# Altium PCB AUDIO-AMPLIFIER.PcbDoc
Units mm, origin at the board's own origin, x right, y up, seen from the top; angles counter-clockwise.
Board outline 66.17 x 46.1 mm, 2 copper layers (Top Layer, Bottom Layer); 15 components, 11 nets, 34 pads, 0 vias.
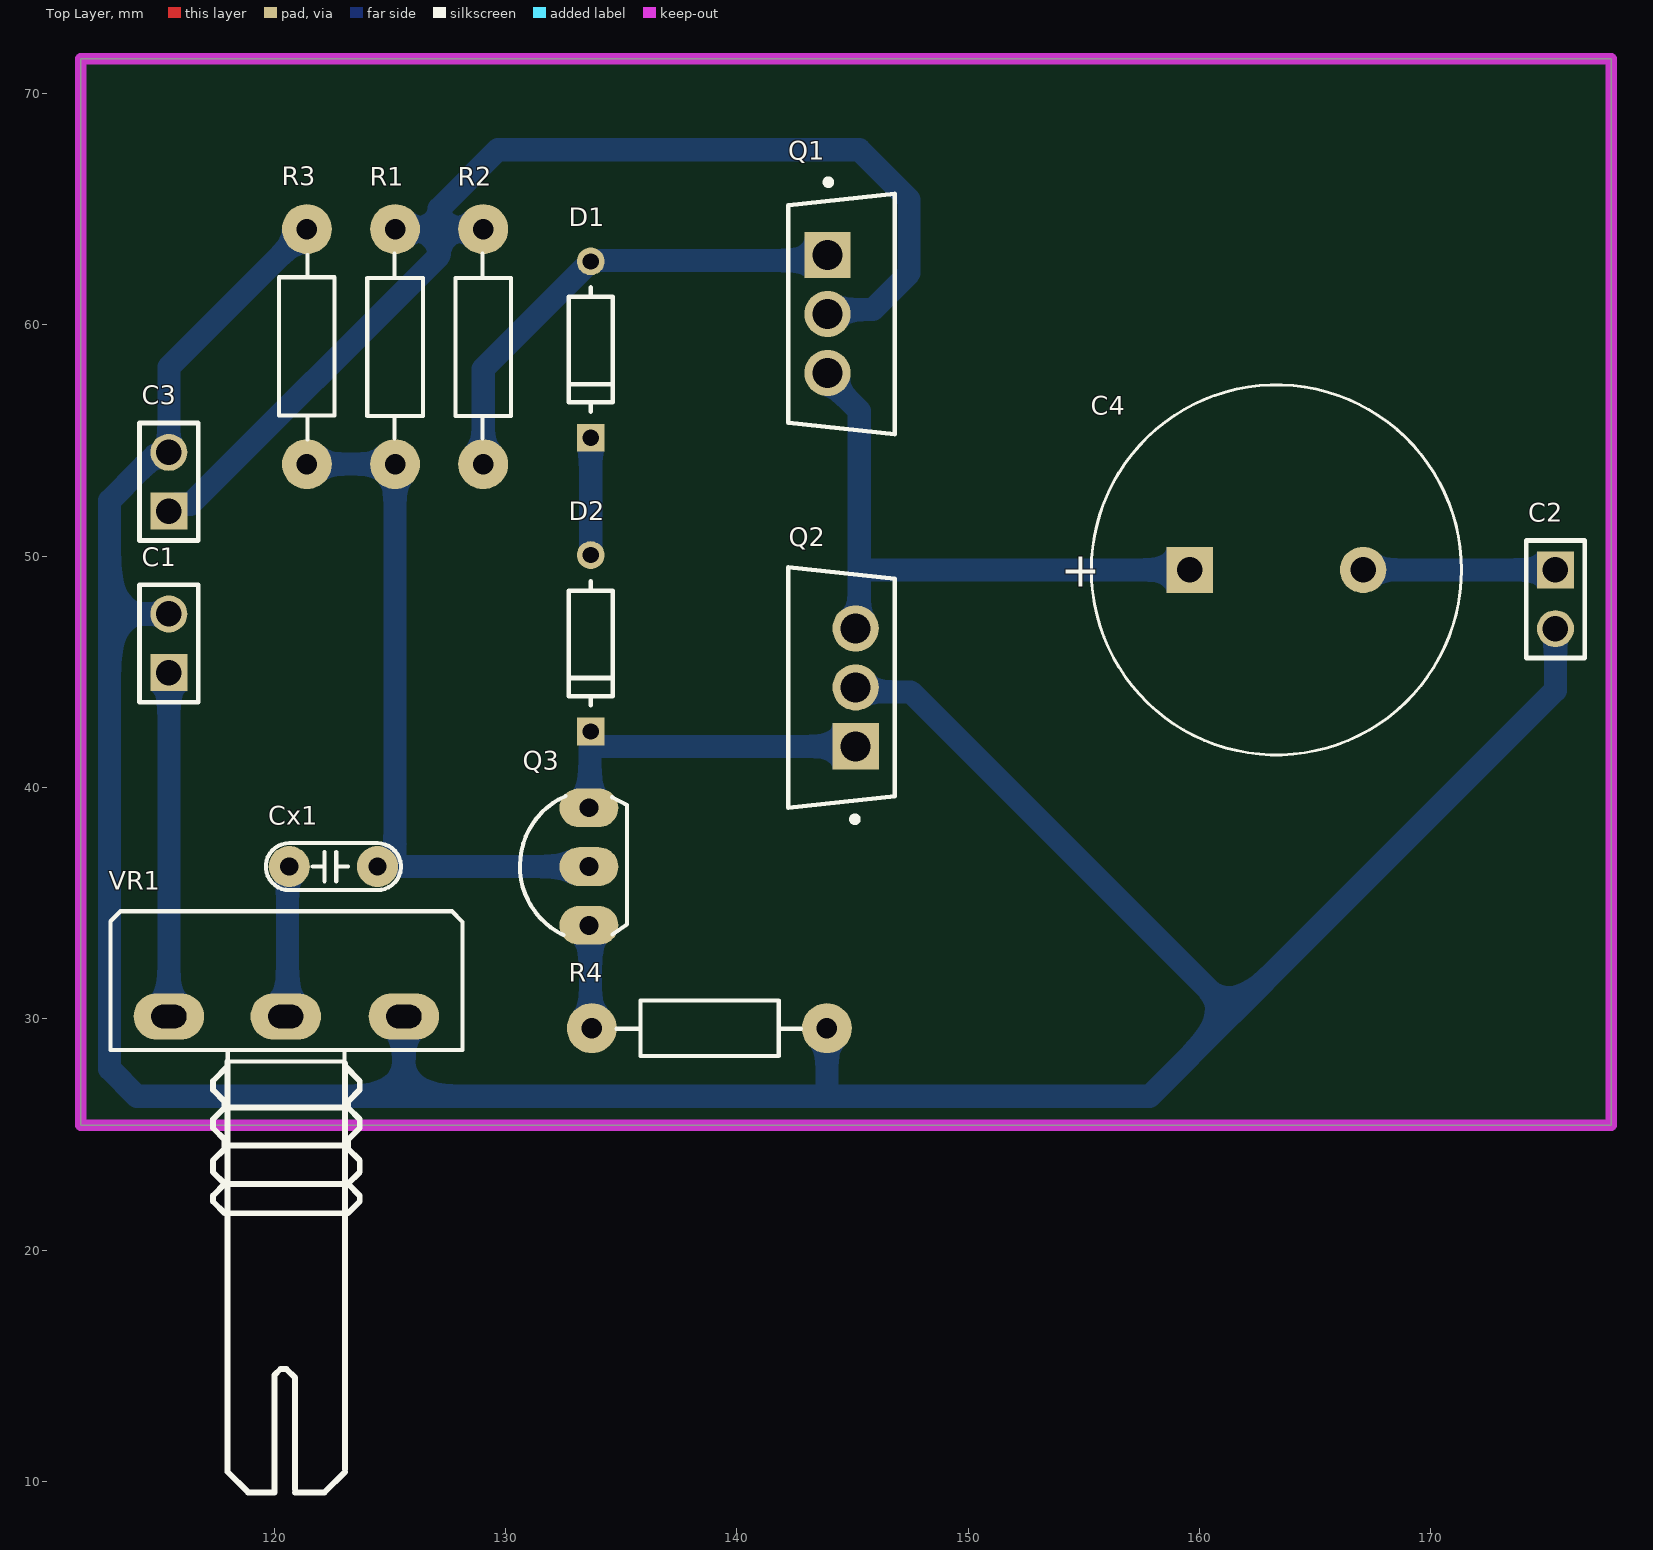
[diagram p0: Top Layer view]
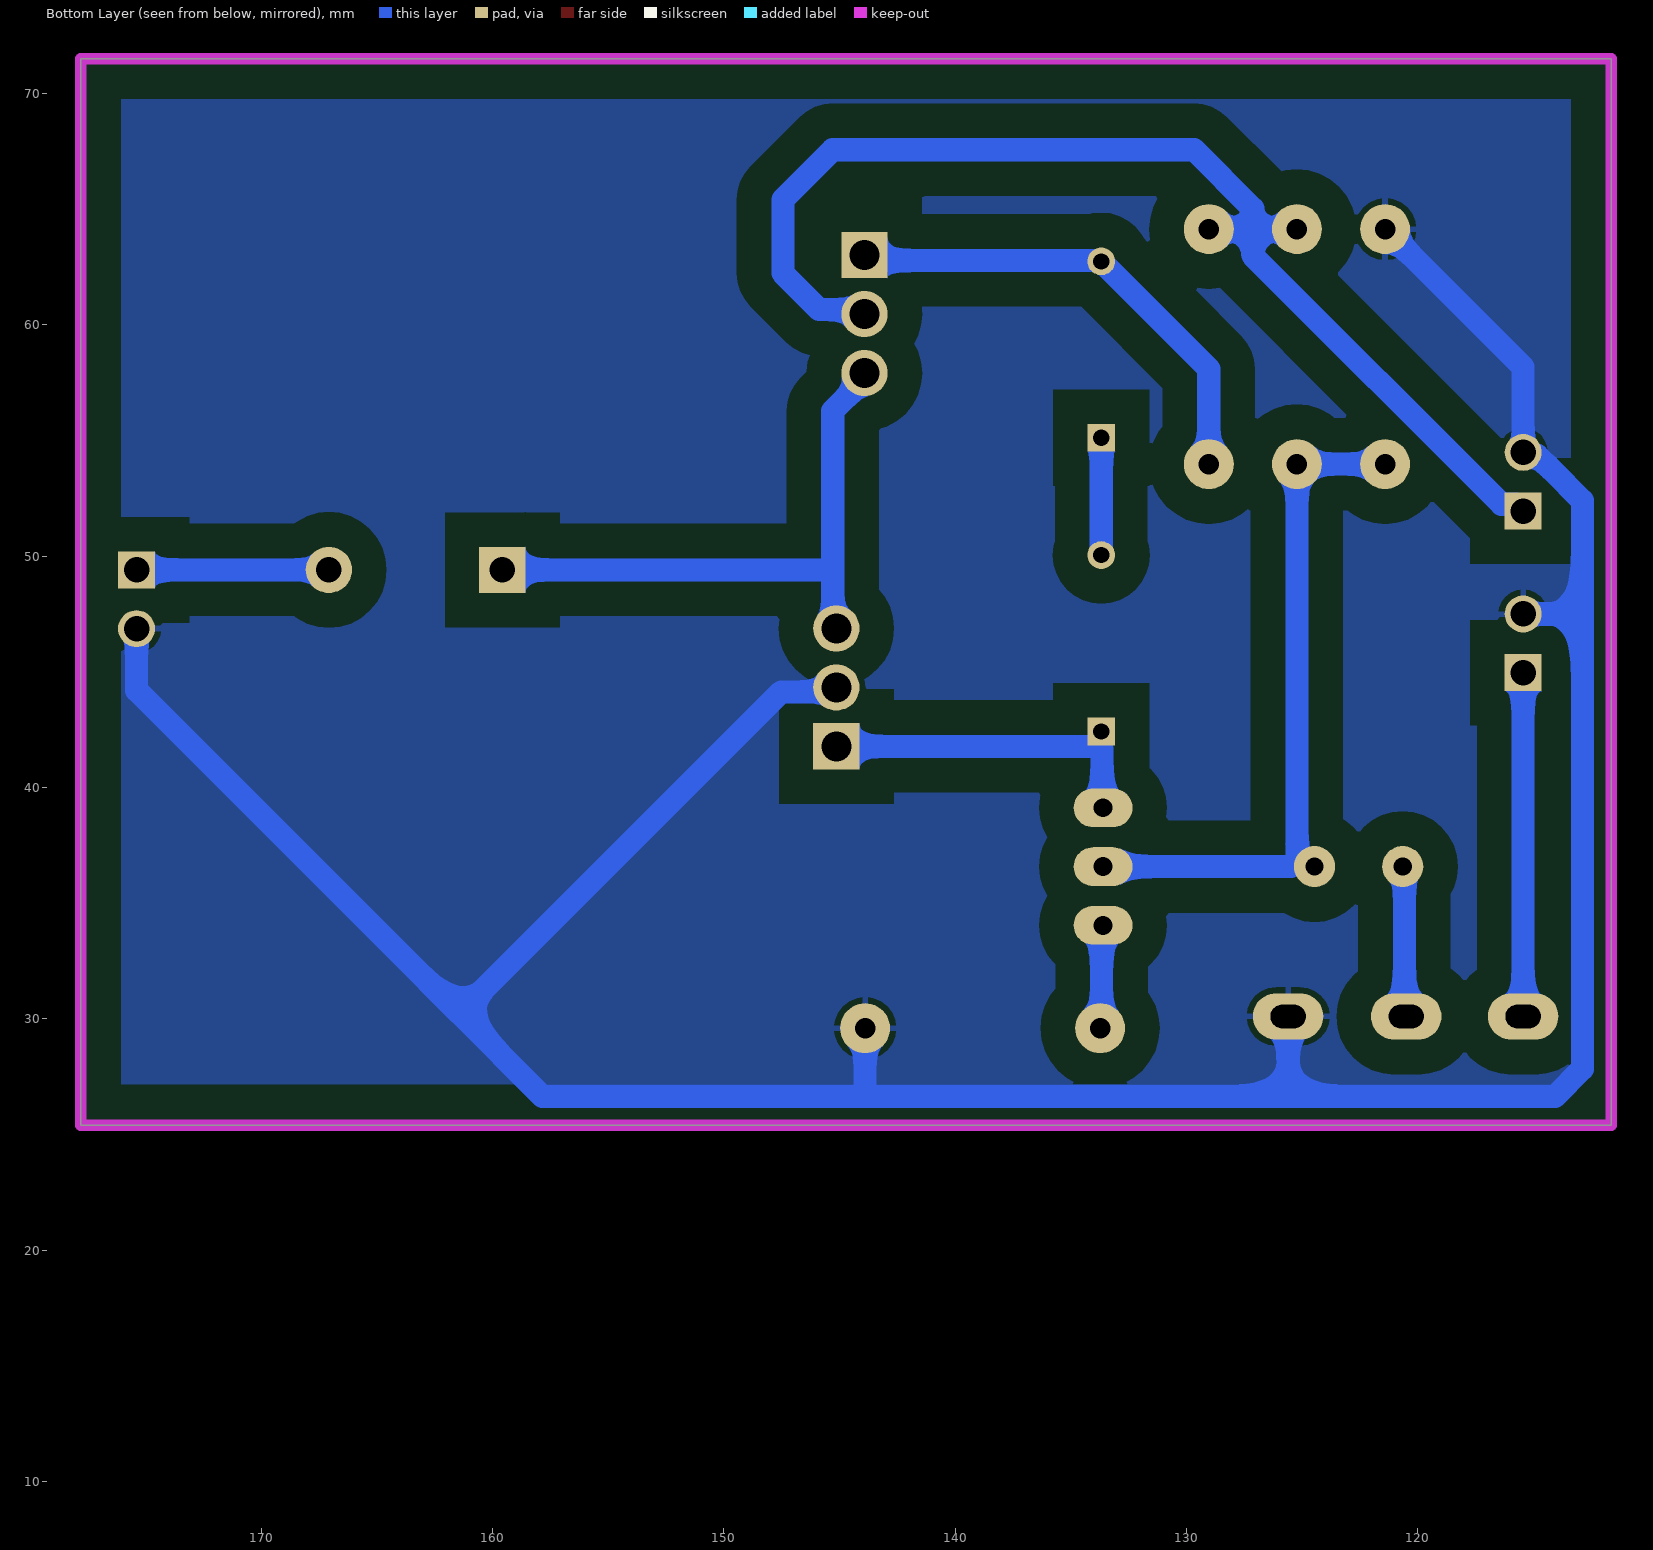
[diagram p1: Bottom Layer view, seen from below]
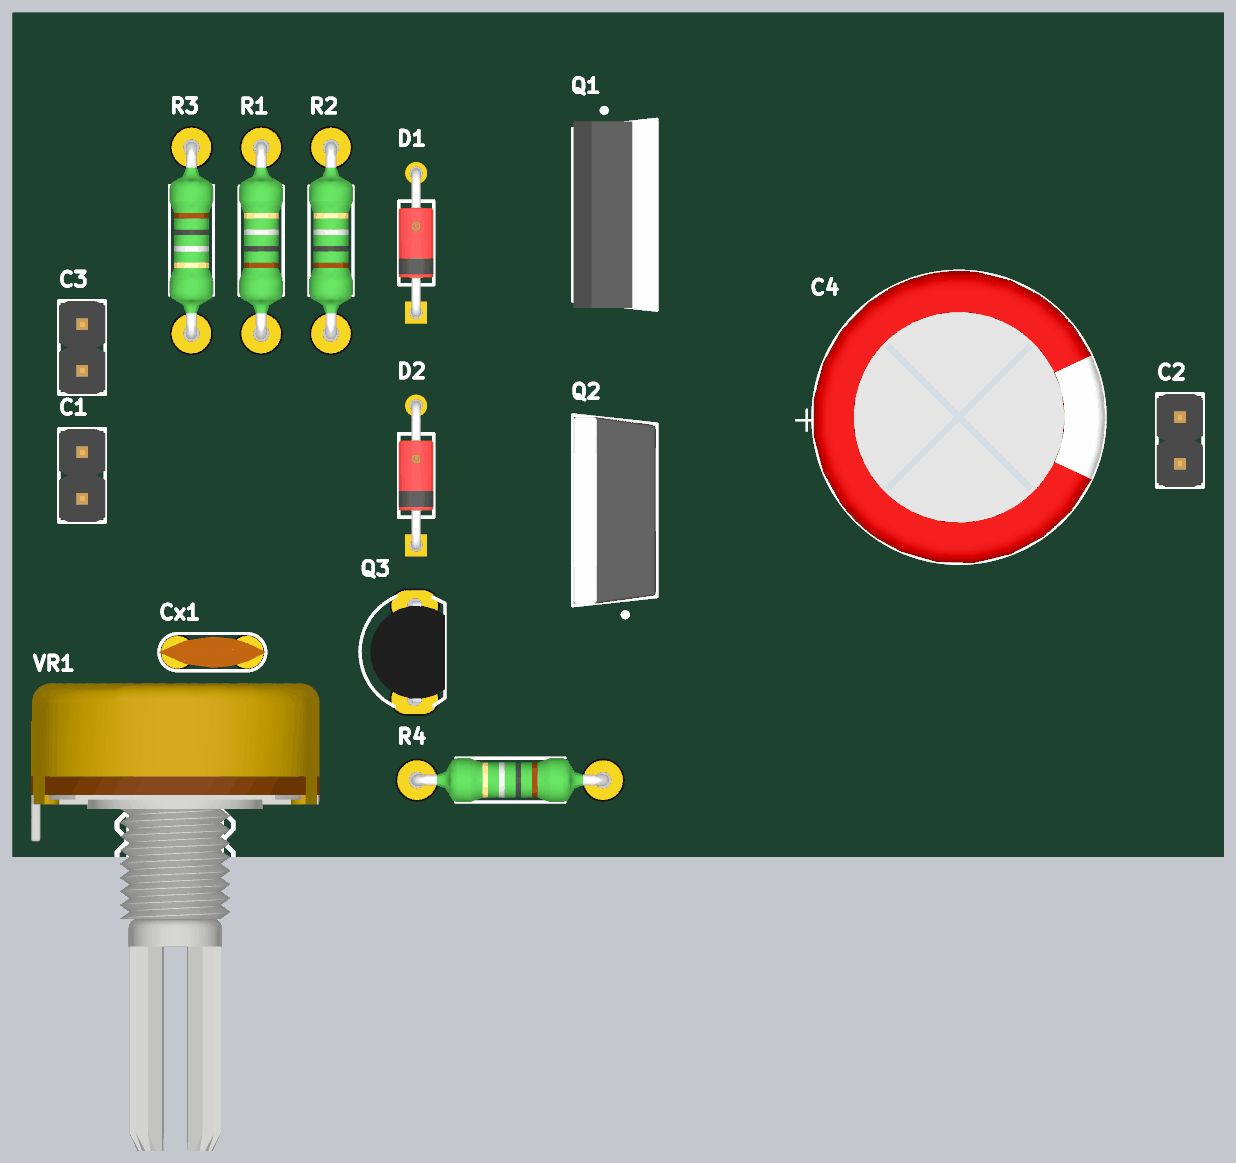
[diagram p2: 3D render of the assembled board from above, using the file's embedded part models]

## Layer stack, top to bottom
Top Solder: solder mask 0.0102, Solder Resist, Dk 3.5
Top Layer: signal copper 0.0356
Dielectric 1: dielectric 0.32, FR-4, Dk 4.8
Bottom Layer: signal copper 0.0356
Bottom Solder: solder mask 0.0102, Solder Resist, Dk 3.5

## Board outline
111.633,25.4 177.8,25.4 177.8,71.501 111.633,71.501

## Design rules (kind name [scope] priority, off if disabled: settings)
Clearance [All] p1: gap=0.5 ignorepadtopadclearanceinfootprint=FALSE
PolygonConnect [All] p1: connectstyle=Relief reliefconductorwidth=0.254 reliefentries=4 polygonreliefangle="90 Angle" airgapwidth=0.254
RoutingVias [All] p1: holewidth=0.711 width=1.27 viastyle="Through Hole" minholewidth=0.711 minwidth=1.27 maxholewidth=0.711 maxwidth=1.27
SolderMaskExpansion [All] p1: expansion=0.102 istentingtop=FALSE
Width [All] p1: maxlimit=1 minlimit=0.4 preferedwidth=0.5
30 further rules are at their usual default settings.

## Components (designator, comment, footprint, x,y, rotation, side; value= is the part's Value field where it differs from the comment)
C1 "JP2" JP2-D1T 115.443,44.958 r90 top
C2 "JP2" JP2-D1T 175.387,49.403 r270 top
C3 "JP2" JP2-D1T 115.443,51.943 r90 top
C4 "1000uF" CA-ALU-16 163.322,49.403 r0 top value=104
Cx1 "1uF" CN1.5 122.428,36.576 r0 top value=33pF
D1 "1N4148" FP-017AG-MFG 133.681,58.928 r90 top
D2 "1N4148" FP-017AG-MFG 133.681,46.228 r90 top
Q1 "TIP31C" FP-TO-220-P0A0015988-MFG 144.526,60.462 r0 top
Q2 "TIP32C" FP-TO-220-P0A0015988-MFG 144.526,44.323 r180 top
Q3 "2N3904" TO92-123 133.604,36.576 r90 top value=C1815
R1 "100K" RES-1/4W 125.095,58.674 r270 top
R2 "1K" RES-1/4W 128.905,58.674 r270 top
R3 "15K" RES-1/4W 121.539,59.436 r90 top
R4 "100R" RES-1/4W 139.192,29.464 r0 top
VR1 "1k" VR-S1 120.523,30.099 r0 top value="Volume 50k"

## Footprints (in the part's own frame and the unit in brackets; to place one, negate y for a bottom-side part, rotate by r counter-clockwise, add the part's x,y. Pads: shape width x height; smd on the part's side, far side on the other; paste and mask are expansions set on the pad)
CA-ALU-16 [mm] "Polarized capacitors, Aluminum Electrolytic Capacitors, 2-Leads, Body 16x21x7.5x0.8"
  rect 2x2 hole 1.1: 1(-3.75,0)
  round 2 hole 1.1: 2(3.75,0)
  silkscreen extent -8,-8 8,8, body extent -7.93,-7.96 7.99,8, height 21.31
CN1.5 [mil]
  round 70 hole 31: 1(-70,0) 2(80,0)
  silkscreen extent -110,-40 120,40, body extent -110,-33 120,33, height 235
FP-017AG-MFG [mm]
  rect 1.2x1.2 hole 0.7 paste-1000 mask+0: 1(-3.813,0)
  round 1.2 hole 0.7 paste-1000 mask+0: 2(3.813,0)
  silkscreen extent -2.68,-0.95 2.68,0.95, body extent -4.51,-1.05 4.51,1.05, height 0.25
FP-TO-220-P0A0015988-MFG [mm]
  rect 2x2 hole 1.3 paste-1000 mask+0: 1(-0.607,2.55)
  round 2 hole 1.3 paste-1000 mask+0: 2(-0.607,0) 3(-0.607,-2.55)
  silkscreen extent -2.3,-5.2 2.3,5.82, body extent -2.4,-5.3 2.4,5.3, height 0.25
JP2-D1T [mm] "2 pins, 1 row, straight, gold plating"
  rect 1.6x1.6 hole 1.1: 1(0,0)
  round 1.6 hole 1.1: 2(2.54,0)
  silkscreen extent -1.27,-1.27 3.81,1.27, body extent -1.27,-1.27 3.81,1.27, height 8.54
RES-1/4W [mil]
  round 85 hole 35: 1(-215,5) 2(185,5)
  silkscreen extent -173,-42 141,52, body extent -227,-42 197,52, height 95
TO92-123 [mil] "TO-92"
  oval 66x100 hole 32: 1(-100,0) 2(0,0) 3(100,0)
  silkscreen extent -117,-65 120,118, body extent -109,-66 109,95, height 245
VR-S1 [mil]
  oval 120x78.74 hole 40 slot 60 at 0 deg: 1(-200,0) 2(-1,0) 3(200,0)
  silkscreen extent -299,-810 300,179, body extent -310,-818 310,188, height 839

## Part data
C1 C2 C3: "WR-PHD 2.54 mm Angled Socket Header", Manufacturer="W¨¹rth Elektronik eiSos GmbH", partNo=613002143121, ComponentLink1 Description=Manufacturer, ComponentLink1URL=http://www.we-online.com, ComponentLink2 Description=Datasheet, ComponentLink2URL=http://katalog.we-online.de/em/datasheet/6130xx143121.pdf, Created by="Karrer Zheng", Created Date="29 March 2013", NoPins=02
C4: library part CN-ALU-DIP, "Capacitor (Semiconductor SIM Model)", LatestRevisionDate=17-Jul-2002, LatestRevisionNote="Re-released for DXP Platform.", PackageReference=C1206, Publisher="Altium Limited"
Cx1: library part CN
D1 D2: library part CMP-07163-000046-1, "DIODE GEN PURP 100V 200MA DO35", Average Rectified Current=200mA, Capacitance=4pF, Case/Package=DO-35, Current=4A, Forward Current=300mA, Forward Voltage=1V, Max Forward Surge Current (Ifsm)=1A, Max Operating Temperature=175°C, Max Power Dissipation=500mW, Max Repetitive Reverse Voltage (Vrrm)=100V, Max Reverse Current=5uA, Min Operating Temperature=-65°C, Package Quantity=2000, Contact Plating=Tin, Current Rating=200mA, Diameter=1.91mm, Element Configuration=Single, Height=4.56mm, Lead Free="Lead Free", Length=4.56mm, Max Reverse Voltage (DC)=100V, Max Surge Current=4A, Mount="Through Hole", Number of Pins=2, Output Current=200mA, Outside Diameter=1.85mm, Packaging=Bulk, Peak Non-Repetitive Surge Current=4A, Polarity=Standard, Power Dissipation=500mW, Radiation Hardening=No, REACH SVHC="No SVHC", Recovery Time=4ns, Reverse Recovery Time=4ns, Reverse Voltage=100V, Series=-, Voltage=100V, Voltage Rating (DC)=100V, Weight=0.01lb, Width=1.91mm
Q1: library part CMP-12195-000001-1, "TRANS NPN 100V 3A TO-220", Collector Base Voltage=100V, Collector Emitter Saturation Voltage=1.2V, Emitter Base Voltage=5V, Manufacturer=STMicroelectronics, Max Collector Current=3A, Max Junction Temp=+150°C, Package=TO-220-P0A0015988, Power Dissipation=2W, Temperature="to +150°C", Automotive=No, Category=Trans, Collector Emitter Voltage=100V, ComponentLink2Description=Datasheet, ComponentLink2URL=https://www.st.com/resource/en/datasheet/tip31c.pdf, Device Class L1="Discrete Semiconductors", Device Class L2=Transistors, Device Class L3=BJTs, Digikey Description="TRANS NPN 100V 3A TO-220", Height=19.68mm, Hfe Max=50, Hfe Min=10, Hfe Testic=3A, Hfe Testvce=4V, Lead Free=Yes, Manufacturer Part Number=TIP31C, Mouser Description="Bipolar Transistors - BJT NPN Gen Pur Power", Number Of Elements=1, Number Of Npn=1, Octopart=https://octopart.com/tip31c-stmicroelectronics-15555, RoHS=TRUE, Standoff Height=3.5mm, Temperature Range High=+150°C
Q2: library part CMP-12195-000005-1, "TRANS PNP 100V 3A TO-220", Collector Base Voltage=-100V, Collector Emitter Saturation Voltage=-1.2V, Emitter Base Voltage=-5V, Manufacturer=STMicroelectronics, Max Collector Current=-3A, Max Junction Temp=+150°C, Package=TO-220-P0A0015988, Power Dissipation=2W, Temperature="to +150°C", Automotive=No, Category=Trans, Collector Emitter Voltage=-100V, ComponentLink2Description=Datasheet, ComponentLink2URL=https://www.st.com/resource/en/datasheet/tip32c.pdf, Device Class L1="Discrete Semiconductors", Device Class L2=Transistors, Device Class L3=BJTs, Digikey Description="TRANS PNP 100V 3A TO-220", Height=19.68mm, Hfe Max=50, Hfe Min=10, Hfe Testic=-3A, Hfe Testvce=-4V, Lead Free=Yes, Manufacturer Part Number=TIP32C, Mouser Description="Original ST Microelectronics Transistor, 100V, 3A, .22 Ohm, TO-220 Package", Number Of Elements=1, Number Of Pnp=1, Octopart=https://octopart.com/tip32c-stmicroelectronics-353617, RoHS=TRUE, Standoff Height=3.5mm, Temperature Range High=+150°C
Q3: library part 2N904, "NPN 600mW, ECB"
R1 R2 R3 R4: library part Res, "Res", Manufacturer="Generic Components", Class=Passive, Published=08/06/2000, Publisher="Altium Hobart Technology Centre", SubClass=R
VR1: library part VR-S, "Var Resistor"

## Nets (pads, with @x,y where several pads share a name; then routed paths per layer and width w, separated by ;. In a path a pad name is that pad's centre, name@x,y a point inside that pad or via, vN(x,y) a via of type N, cw(c..) or ccw(c..) an arc to the next point about the centre after c; other vN are vias at no path point)
12V: C3.1 Q1.2 R1.1 R2.1 | length 51.8
  Bottom Layer w1: C3.1 115.743,52.243 116.378,52.243 127.127,62.992 127.127,64.135 ; R1.1 127.127,64.135 ; R2.1 127.127,64.135 ; Q1.2 144.11,60.653 145.87,60.653 147.447,62.23 147.447,65.405 145.288,67.564 129.667,67.564 127.127,65.024 127.127,64.135
AUDIO_IN: C1.1 VR1.1 | length 14.9
  Bottom Layer w1: VR1.1 C1.1
AUDIO_OUT: C2.1 C4.2 | length 8.3
  Bottom Layer w1: C4.2 C2.1
GND: C1.2 C2.2 C3.2 Q2.2 R3.2 R4.2 VR1.3 | length 144.2
  Bottom Layer w1: C1.2 112.883,47.498 ; R3.2 115.443,58.166 C3.2 115.328,54.368 114.854,54.368 114.229,53.743 112.883,52.397 112.883,47.498 ; VR1.3 125.603,26.65 ; R4.2 143.891,26.904 144.145,26.65 ; Q2.2 145.325,44.132 147.511,44.132 161.417,30.226 ; C2.2 175.387,44.196 161.417,30.226 ; 112.883,47.498 112.883,27.833 114.066,26.65 125.603,26.65 ; 125.603,26.65 144.145,26.65 ; 144.145,26.65 157.841,26.65 161.417,30.226
NetC4_1: C4.1 Q1.3 Q2.3 | length 26.1
  Bottom Layer w1: Q1.3 143.919,57.641 145.288,56.272 145.288,49.149 ; Q2.3 145.288,47.028 145.288,49.149 ; C4.1 145.542,49.403 145.288,49.149
NetCx1_1: Cx1.1 VR1.2 | length 6.5
  Bottom Layer w1: VR1.2 120.574,30.175 120.574,36.5 Cx1.1
NetCx1_2: Cx1.2 Q3.2 R1.2 R3.1 | length 29.4
  Bottom Layer w1: R3.1 R1.2 125.222,36.83 125.476,36.576 Q3.2
NetD1_1: D1.1 D2.2 | length 5.1
  Bottom Layer w1: D2.2 D1.1
NetD1_2: D1.2 Q1.1 R2.2 | length 21
  Bottom Layer w1: R2.2 129.032,58.092 D1.2 133.719,62.779 143.686,62.779 Q1.1
NetD2_1: D2.1 Q2.1 Q3.3 | length 14.1
  Bottom Layer w1: Q3.3 133.642,39.154 133.642,41.656 133.759,41.773 Q2.1
NetQ3_1: Q3.1 R4.1 | length 4.5
  Bottom Layer w1: Q3.1 133.667,33.972 133.667,29.654 R4.1

## Polygon pours and split planes (outlines as drawn)
GND on Bottom Layer "GND_L02_P000" (solid, pour order 0): 111.633,25.4 111.633,71.501 177.8,71.501 177.8,25.4

## Keep-outs
Keep-Out Layer:
  the board outline again, w0.5

## Text inside footprints (layer, text, board x,y; h text height)
C4: Top Overlay "+" at 153.997,48.666 h1.5